# Altium PCB pcb_recepteur.PcbDoc
Units mil, origin at the board's own origin, x right, y up, seen from the top; angles counter-clockwise.
Board outline 2510.38 x 1639.99 mil, 2 copper layers (Top Layer, Bottom Layer); 16 components, 16 nets, 55 pads, 0 vias.
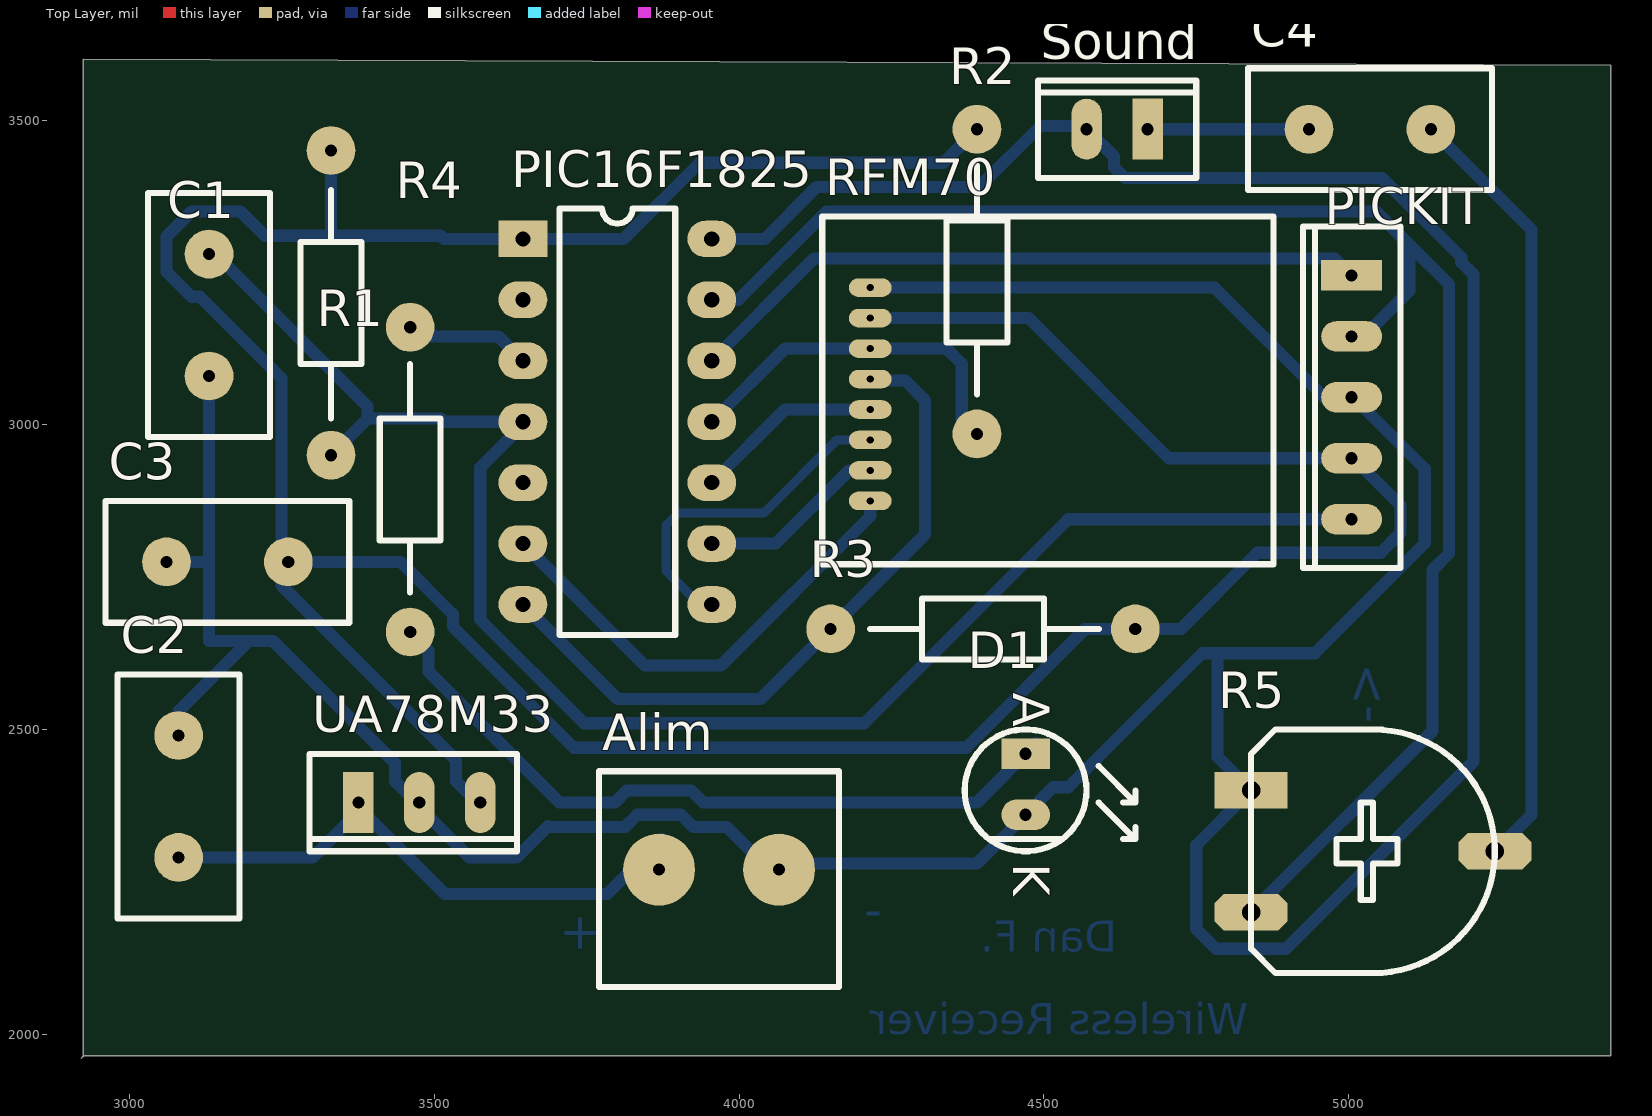
[diagram p0: Top Layer view]
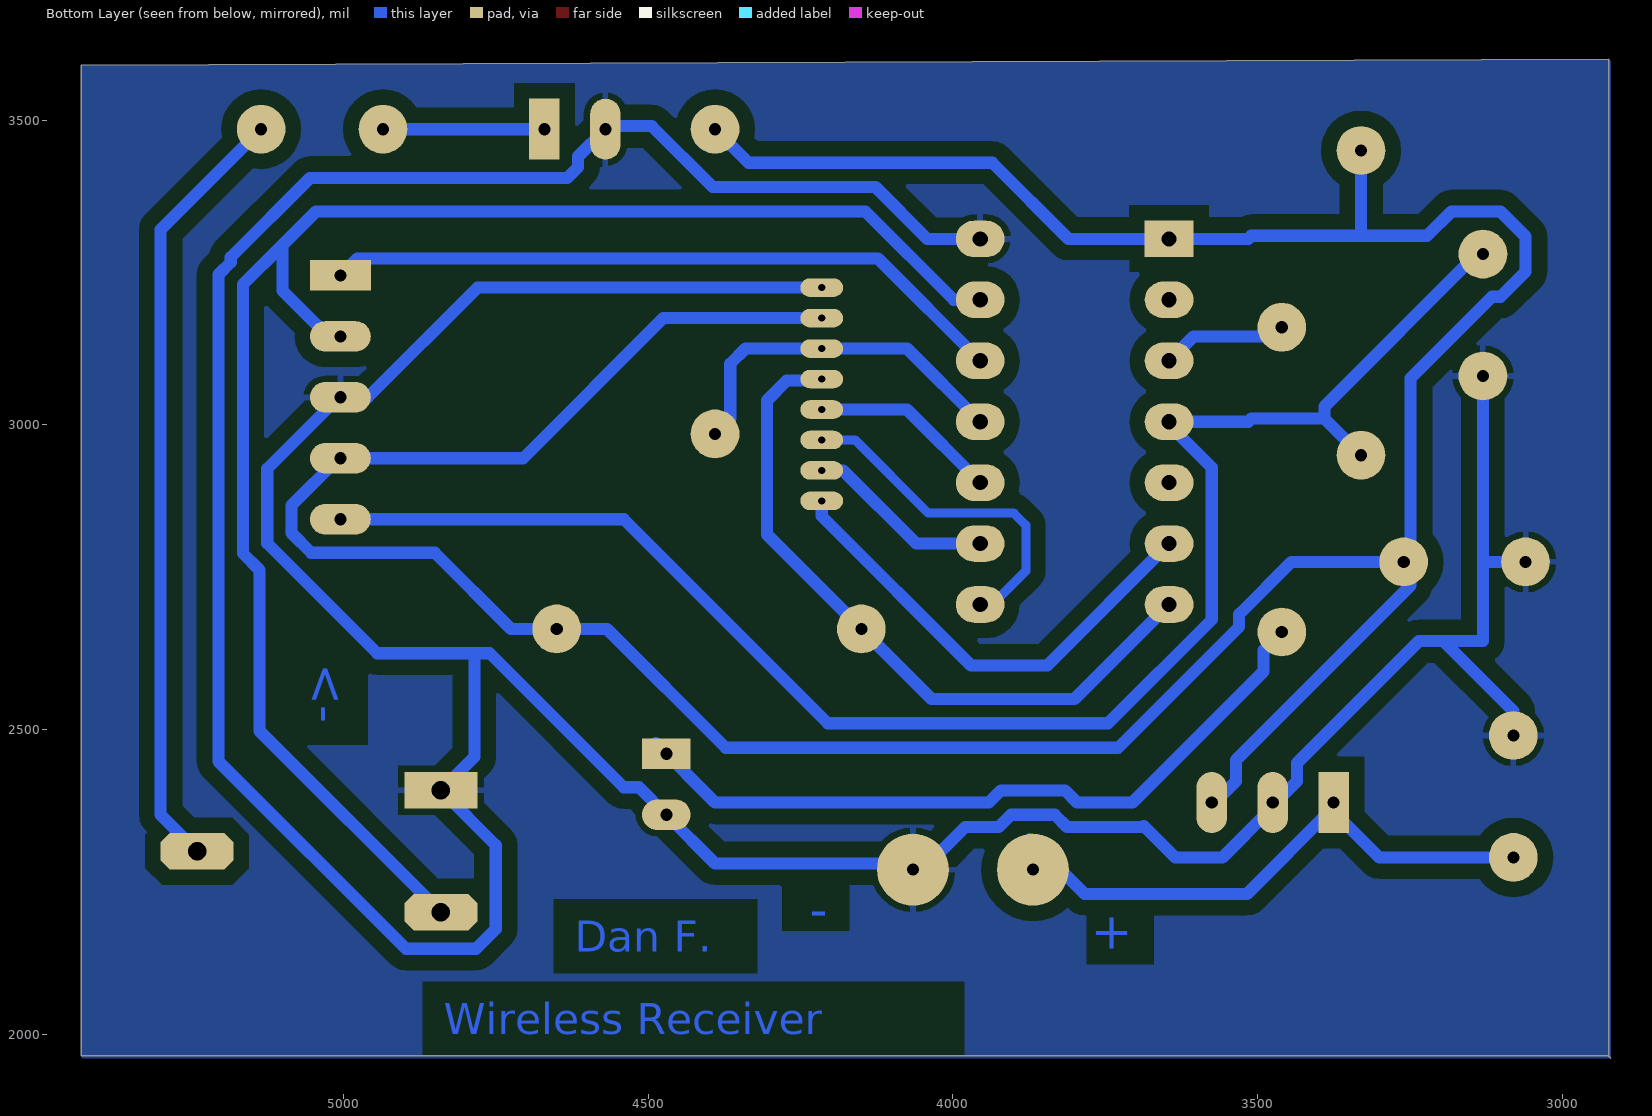
[diagram p1: Bottom Layer view, seen from below]

## Layer stack, top to bottom
Top Layer: signal copper 1.4
Dielectric: dielectric 12.6, FR-4, Dk 4.8
Bottom Layer: signal copper 1.4

## Board outline
2923.54,3599.99 2923.54,1963.54 2920,1960 2924.62,1964.62 5430.38,1964.62 5430.38,3589.62 5430,3590

## Design rules (kind name [scope] priority, off if disabled: settings)
Clearance [All] p1: gap=20
PolygonConnect [All] p1: connectstyle=Relief reliefconductorwidth=10 reliefentries=4 polygonreliefangle="90 Angle" airgapwidth=10
RoutingLayers [All] p1: top layer_v5=FALSE bottom layer_v5=TRUE
RoutingVias [All] p1: holewidth=28 width=50 viastyle="Through Hole" minholewidth=28 minwidth=50 maxholewidth=28 maxwidth=50
SolderMaskExpansion [All] p1: expansion=4
Width [All] p1: maxlimit=20 minlimit=15 preferedwidth=20
27 further rules are at their usual default settings.

## Components (designator, comment, footprint, x,y, rotation, side; value= is the part's Value field where it differs from the comment)
Alim "Bornier_2" Bornier_2 3770,2270 r0 top
C1 "Cap2" CAPA2 3130,3080 r90 top
C2 "Cap2" CAPA2 3080,2490 r270 top
C3 "Cap2" CAPA2 3060,2775 r0 top
C4 "Cap2" CAPA2 5135,3485 r180 top
D1 "Led" LED 4470,2460 r270 top
PIC16F1825 "PIC16F1825" PIC16F1825 3645,3305 r0 top
PICKIT "CONKK5" CONKK5 5005,3245 r270 top
R1 "Res2" res5_1/4W 3330,2950 r90 top
R2 "Res2" res5_1/4W 4390,3485 r270 top
R3 "Res2" res5_1/4W 4650,2665 r180 top
R4 "Res2" res5_1/4W 3460,3160 r270 top
R5 "RPot1" AJUSTABLE 4840,2400 r270 top
RFM70 "RFM70" RFM70 4215,3275 r270 top
Sound "CONKK2" CONKK2 4670,3485 r180 top
UA78M33 "CONKK3" CONKK3 3375,2380 r0 top

## Footprints (in the part's own frame and the unit in brackets; to place one, negate y for a bottom-side part, rotate by r counter-clockwise, add the part's x,y. Pads: shape width x height; smd on the part's side, far side on the other; paste and mask are expansions set on the pad)
AJUSTABLE [mil]
  rect 60x120 hole 30: 1(0,0)
  oct 60x120 hole 30: 2(200,0) 3(100,400)
  silkscreen extent -100,0 300,400
Bornier_2 [mm]
  round 3 hole 0.508: 1(2.5,0) 2(7.5,0)
  silkscreen extent 0,-4.9 10,4.1
CAPA2 [mil]
  round 80 hole 20: 1(0,0) 2(200,0)
  silkscreen extent -100,-100 300,100
CONKK2 [mil]
  rect 50x100 hole 20: 1(0,0)
  oval 50x100 hole 20: 2(100,0)
  silkscreen extent -80,-80 180,80
CONKK3 [mil]
  rect 50x100 hole 20: 1(0,0)
  oval 50x100 hole 20: 2(100,0) 3(200,0)
  silkscreen extent -80,-80 260,80
CONKK5 [mil]
  rect 50x100 hole 20: 1(0,0)
  oval 50x100 hole 20: 2(100,0) 3(200,0) 4(300,0) 5(400,0)
  silkscreen extent -80,-80 480,80
LED [mil]
  rect 50x80 hole 20: 1(0,0)
  oval 50x80 hole 20: 2(100,0)
  silkscreen extent -40,-100 160,180
PIC16F1825 [mil]
  rect 80x60 hole 25: 1(0,0)
  oval 80x60 hole 25: 2(0,-100) 3(0,-200) 4(0,-300) 5(0,-400) 6(0,-500) 7(0,-600) 8(310,-600) 9(310,-500) 10(310,-400) 11(310,-300) 12(310,-200) 13(310,-100) 14(310,0)
  silkscreen extent 60,-650 250,50
res5_1/4W [mil]
  round 80 hole 20: 1(0,0) 2(500,0)
  silkscreen extent 60,-50 435,50
RFM70 [mil]
  oval 30.43x70 hole 11.81: 1(50,0) 2(100,0) 3(150,0) 4(200,0) 5(250,0) 6(300,0) 7(350,0) 8(400,0)
  silkscreen extent -67,-79 504,661

## Part data
Alim: "Header, 2-Pin"
C1 C2 C3 C4: "Capacitor"
D1: "LED"
R1 R2 R3 R4: "Resistor"
R5: "Potentiometer"

## Nets (pads, with @x,y where several pads share a name; then routed paths per layer and width w, separated by ;. In a path a pad name is that pad's centre, name@x,y a point inside that pad or via, vN(x,y) a via of type N, cw(c..) or ccw(c..) an arc to the next point about the centre after c; other vN are vias at no path point)
3V3: C3.2 PIC16F1825.1 PICKIT.4 R1.2 R2.1 R3.1 RFM70.2 UA78M33.3 | length 5982.3
  Bottom Layer w20: C3.2 3443.99,2775 3530,2688.99 3530,2668.58 3728.58,2470 4372.57,2470 4567.57,2665 R3.1 4725,2665 4850,2790 5052.78,2790 5085,2822.22 5085,2867.78 PICKIT.4@5007.78,2945 ; C3.2@3273.62,2761.38 3248.62,2736.38 ; R1.2@3330,3465 3330,3310 ; UA78M33.3@3580,2370 3535,2415 3535,2450 3248.62,2736.38 ; RFM70.2 4475,3175 4705,2945 PICKIT.4 PICKIT.4@5007.78,2945 ; R2.1 4335,3430 3935,3430 3810,3305 PIC16F1825.1 3515,3305 3510,3310 3330,3310 ; PICKIT.4@5045,2945 PICKIT.4@5007.78,2945 ; 3248.62,2736.38 3248.62,3076.38 3115,3210 3101.01,3210 3060,3251.01 3060,3308.99 3101.01,3350 3181.57,3350 3221.57,3310 3330,3310
CE: PIC16F1825.11 R2.2 RFM70.3 | length 595.4
  Bottom Layer w20: PIC16F1825.11 4075,3125 RFM70.3 4340,3125 4365,3100 4365,3010 R2.2
CSN: PIC16F1825.7 R3.2 RFM70.4 | length 1163.8
  Bottom Layer w20: PIC16F1825.7 3800,2550 4035,2550 4305,2820 4305,3040 4272.28,3072.72 4217.28,3072.72 RFM70.4 RFM70.4@4212.72,3072.72
DEBUG: PIC16F1825.3 R4.1 | length 207.8
  Bottom Layer w20: R4.1 3475,3145 3605,3145 PIC16F1825.3
GND: Alim.2 C1.1 C2.1 C3.1 D1.2 PIC16F1825.14 PICKIT.3 R5.1 RFM70.1 Sound.2 UA78M33.2 | length 7672.6
  Bottom Layer w20: C3.1 3130,2775 ; C2.1 3080,2530 3195,2645 ; C1.1 3130,2775 ; PIC16F1825.14 4041.86,3305 4126.86,3390 4393.99,3390 4493.99,3490 4565,3490 Sound.2 4615,3440 4615,3422.57 4632.57,3405 5055,3405 5185,3275 5185,3266.57 5205,3246.57 5205,2447.57 4897.43,2140 4782.57,2140 4750,2172.57 4750,2310 R5.1 4785,2455 4785,2625 ; RFM70.1 4780,3225 4960,3045 PICKIT.3 PICKIT.3@5007.78,3045 ; PICKIT.3@5025,3045 PICKIT.3@5007.78,3045 ; 3130,2775 3130,2645 3235,2645 3435,2445 3435,2415 3480,2370 3480,2367.22 3557.22,2290 3635,2290 3686.72,2341.72 3688.43,2340 3812.48,2340 3832.48,2360 3904.37,2360 3924.37,2340 3979.37,2340 4039.37,2280 4390,2280 D1.2 4515,2405 4540,2405 4760,2625 4785,2625 ; 4785,2625 4944.35,2625 5125,2805.65 5125,2927.78 PICKIT.3@5007.78,3045
IRQ: PIC16F1825.6 RFM70.8 | length 779.3
  Bottom Layer w20: PIC16F1825.6 3845,2605 3970,2605 4215,2850 RFM70.8
NetC1_2: C1.2 PIC16F1825.4 PICKIT.5 R1.1 | length 2723.6
  Bottom Layer w20: C1.2@3125,3280 3140,3280 3390,3030 3390,3010 ; R1.1 3390,3010 ; PICKIT.5 4540,2845 4205,2510 3745.15,2510 3575,2680.15 3575,2929.85 3645,2999.85 PIC16F1825.4 3515,3005 3510,3010 3390,3010
NetC4_1: C4.1 R5.3 | length 1278.2
  Bottom Layer w20: C4.1 5300,3320 5300,2360 R5.3
NetC4_2: C4.2 Sound.1 | length 265
  Bottom Layer w20: Sound.1 C4.2
NetD1_1: D1.1 R4.2 | length 1220.9
  Bottom Layer w20: R4.2 3490,2630 3490,2595 3705,2380 3795.91,2380 3815.91,2400 3920.94,2400 3940.94,2380 4390,2380 D1.1@4487.5,2477.5
PGC: PIC16F1825.12 PICKIT.1 | length 1131
  Bottom Layer w20: PIC16F1825.12 4122.72,3272.72 4977.28,3272.72 PICKIT.1
PGD: PIC16F1825.13 PICKIT.2 R5.2 | length 2685.5
  Bottom Layer w20: PIC16F1825.13 3998.43,3205 4143.43,3350 5045,3350 5100,3295 ; R5.2 5137.5,2497.5 5137.5,2761.58 5165,2789.08 5165,3230 5100,3295 ; PICKIT.2 5025,3145 5100,3220 5100,3295
SCK: PIC16F1825.10 RFM70.5 | length 309.7
  Bottom Layer w20: PIC16F1825.10 4075,3025 RFM70.5
SDI: PIC16F1825.9 RFM70.7 | length 309.7
  Bottom Layer w20: PIC16F1825.9 4060,2805 4180,2925 RFM70.7
SDO: PIC16F1825.8 RFM70.6 | length 565.8
  Bottom Layer w15: PIC16F1825.8 3935,2705 3880,2760 3880,2835 3900,2855 4040,2855 4160,2975 RFM70.6
VIN: Alim.1 C2.2 UA78M33.1 | length 923.5
  Bottom Layer w20: C2.2 3300,2290 3380,2370 3380,2367.22 3517.22,2230 3783.43,2230 Alim.1@3873.43,2320
pads on no net: PIC16F1825.2 PIC16F1825.5

## Polygon pours and split planes (outlines as drawn)
GND on Bottom Layer "Bottom Layer-No Net" (solid, remove dead copper, pour order 2): 2920,3600 2920,1960 5435,1960 5430,1965 5430,3590

## Other copper
Bottom Layer:
  text "->" at 5055,2510 h60 r90
  text "-" at 4205,2175 h60
  text "+" at 3705,2140 h60
  text "Dan F." at 4620,2135 h51.18
  text "Wireless Receiver" at 4835,2000 h51.18

## Text inside footprints (layer, text, board x,y; h text height)
D1: Top Overlay "A" at 4450,2560 h60 r270; Top Overlay "K" at 4450,2280 h60 r270